# EAGLE board TouScruino-PJ-v0 (EAGLE 6.3)
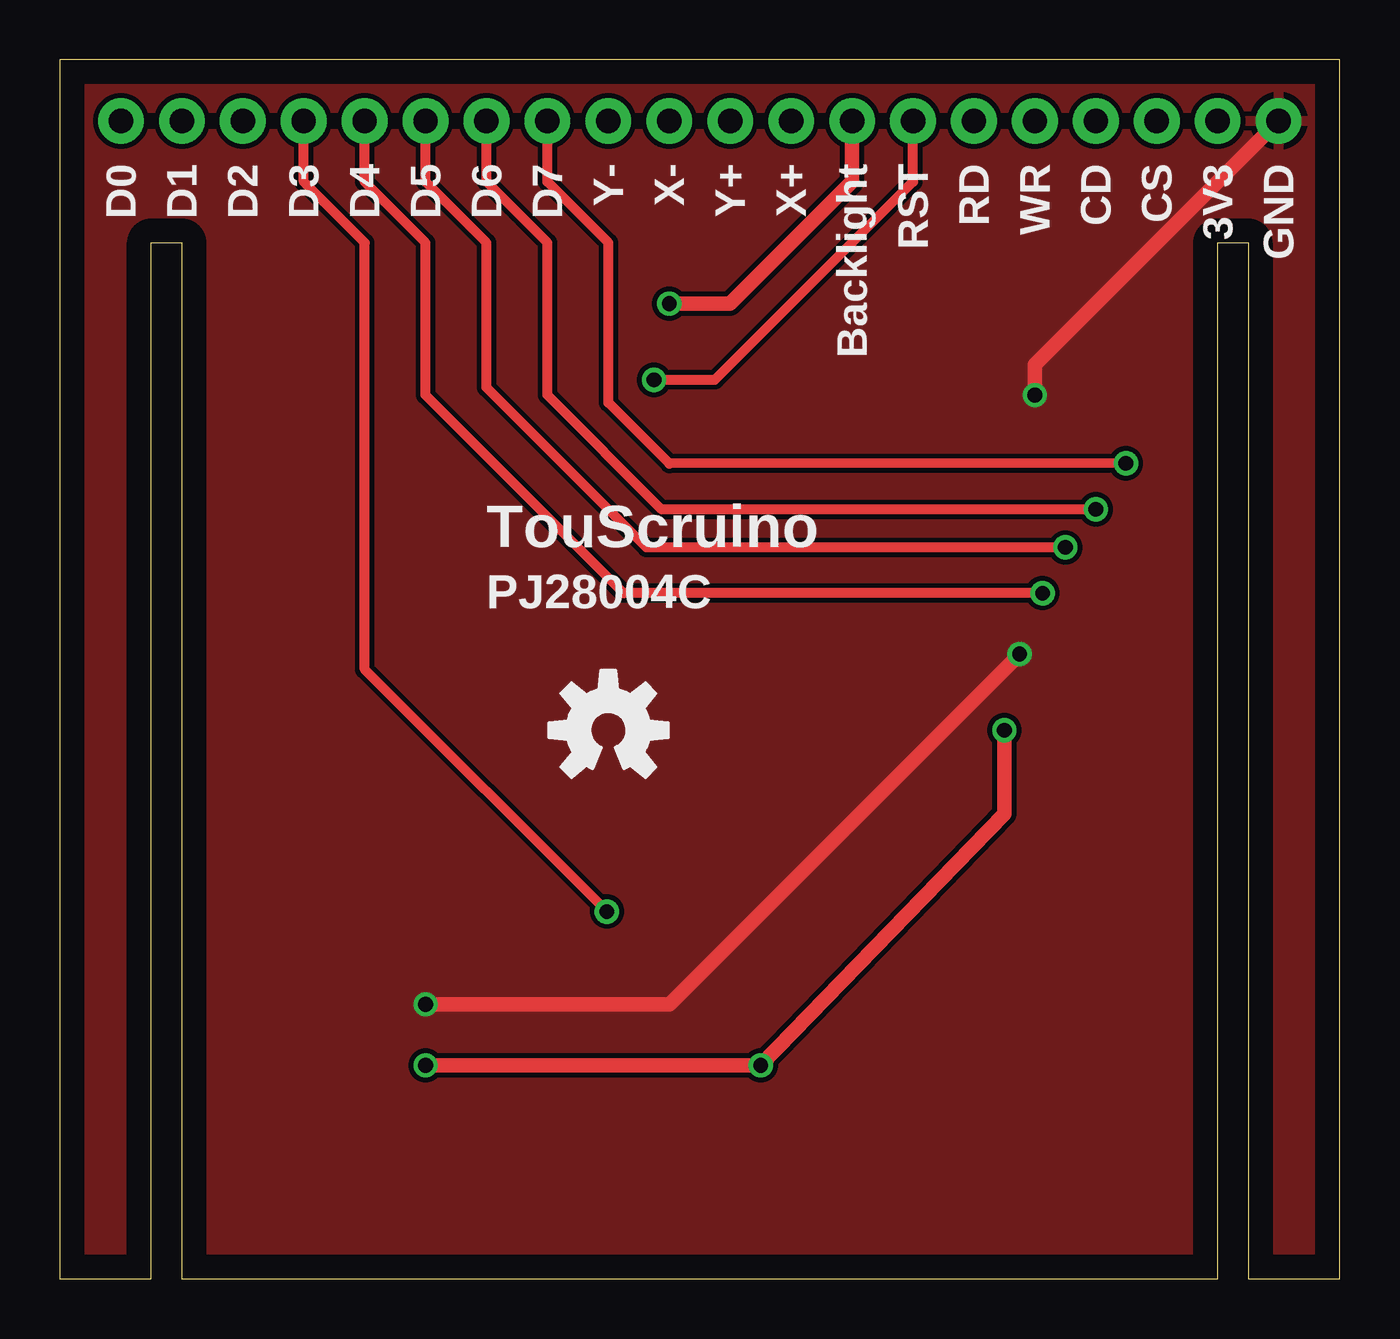
[diagram p0: board, top side]
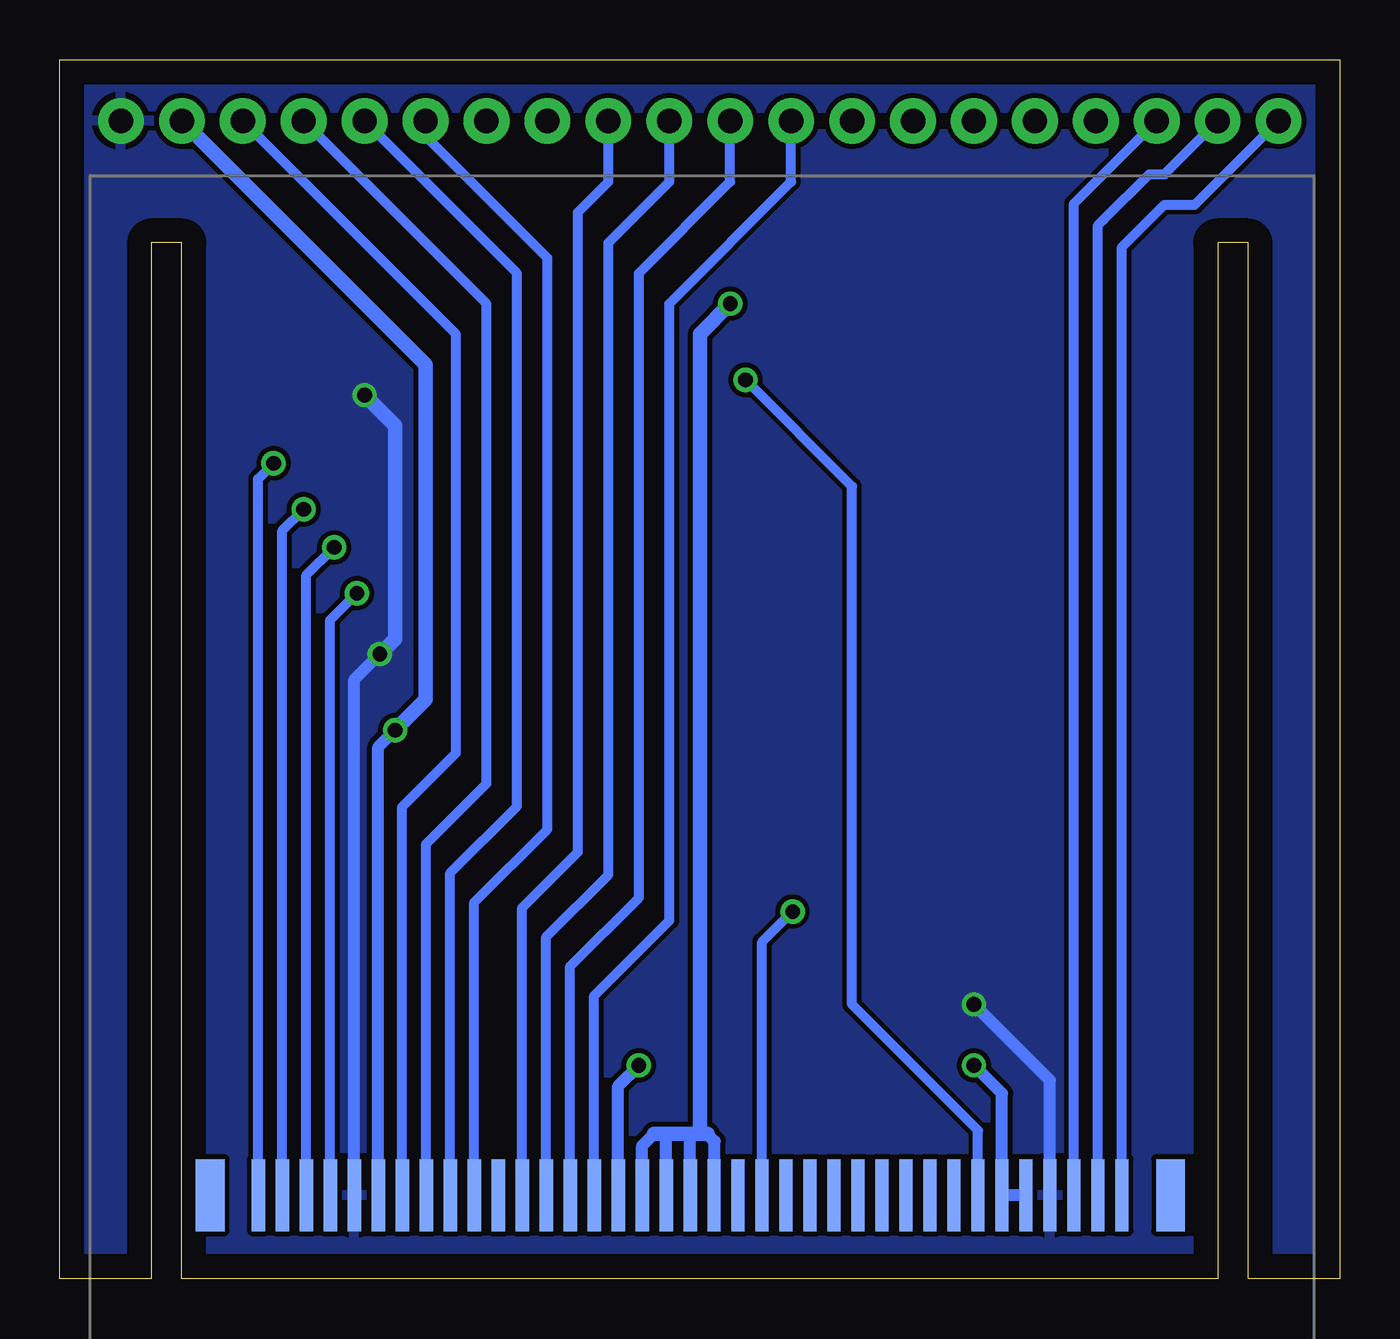
[diagram p1: board, bottom side, seen from below]

Size 53.34 x 50.8 mm. Coordinates in mm from the lower left corner, seen from the top.
Outline: 53.34,0 53.34,50.8 0,50.8 0,0 3.81,0 3.81,43.18 5.08,43.18 5.08,0 48.26,0 48.26,43.18 49.53,43.18 49.53,0 53.34,0
Copper layers (1*16): Top 0.035mm / dielectric 1.5mm / Bottom 0.035mm
Design rules "default": minimum track width 10mil, minimum drill 24mil, track to track 8mil, track to pad 8mil, pad to pad 8mil, via to via 8mil, smd to smd 8mil, copper to edge 40mil, drill to drill 8mil, minimum pad ring 10mil, minimum via ring 8mil, stop-mask expansion 4mil, vias tented up to drill 0mil, thermal gap 10mil
Net classes: 0 default: width 0.203 mm; 1 vcc: width 0.254 mm

## Footprints (pad centres in the part's own frame; a part is rotated, then mirrored left to right if it is on the bottom)
1X20 = drill 1.016 pad 1.905: 1 0,0; 2 2.54,0; 3 5.08,0; 4 7.62,0; 5 10.16,0; 6 12.7,0; 7 15.24,0; 8 17.78,0; 9 20.32,0; 10 22.86,0; 11 25.4,0; 12 27.94,0; 13 30.48,0; 14 33.02,0; 15 35.56,0; 16 38.1,0; 17 40.64,0; 18 43.18,0; 19 45.72,0; 20 48.26,0
TFT_2.8_37 = smd 0.55 x 3: 1 7,26.5; 2 8,26.5; 3 9,26.5; 4 10,26.5; 5 11,26.5; 6 12,26.5; 7 13,26.5; 8 14,26.5; 9 15,26.5; 10 16,26.5; 11 17,26.5; 12 18,26.5; 13 19,26.5; 14 20,26.5; 15 21,26.5; 16 22,26.5; 17 23,26.5; 18 24,26.5; 19 25,26.5; 20 26,26.5; 21 27,26.5; 22 28,26.5; 23 29,26.5; 24 30,26.5; 25 31,26.5; 26 32,26.5; 27 33,26.5; 28 34,26.5; 29 35,26.5; 30 36,26.5; 31 37,26.5; 32 38,26.5; 33 39,26.5; 34 40,26.5; 35 41,26.5; 36 42,26.5; 37 43,26.5 | smd 1.2 x 3: 75 4.988,26.5; 76 45.028,26.5

## Placement (x,y rotation side)
U1  TFT_20  [1X20]  2.54,48.26 0 top
U$2  TFT_2.8_37  [TFT_2.8_37]  52.07,-23.02 0 bottom
U$3  OSHW-LOGOM  [OSHW-LOGO-M]  22.86,22.86 0 top

## Library data of the parts
U1 U$2 = wibauxl
U$3 = SparkFun

## Nets
GND: U1.20 U$2.5 U$2.34
N$1: U1.19 U$2.6 U$2.16 U$2.32 U$2.33
N$2: U1.13 U$2.17 U$2.18 U$2.19 U$2.20
N$5: U1.9 U$2.15
N$6: U1.11 U$2.13
N$7: U1.10 U$2.14
N$8: U1.12 U$2.12
N$9: U1.14 U$2.31
N$10: U1.17 U$2.8
N$11: U1.16 U$2.9
N$12: U1.15 U$2.10
N$13: U1.18 U$2.7
N$14: U1.8 U$2.1
N$15: U1.7 U$2.2
N$16: U1.6 U$2.3
N$17: U1.5 U$2.4
N$18: U1.4 U$2.22
N$19: U1.3 U$2.35
N$20: U1.2 U$2.36
N$21: U1.1 U$2.37

## Tracks (layer width: path | path; a pad name or v marks a point on that pad's centre or on a via)
GND  (via drill 0.61)
  Top 0.61: v40.64,36.83 40.64,38.1 U1.20 | v15.24,11.43 25.4,11.43 v40.01,26.04
  Bottom 0.508: v40.01,26.04 41.07,24.97 U$2.5 | v15.24,11.43 12.07,8.26 U$2.34
  Bottom 0.61: v40.64,36.83 39.37,35.56 39.37,26.67 v40.01,26.04
  pour Bottom: 0,72.07 53.34,72.07 53.34,0 0,0
  pour Top: 0,69.22 53.34,69.22 53.34,0 0,0
N$1  (via drill 0.61)
  Top 0.61: v15.24,8.89 v29.21,8.89 39.37,19.37 v39.37,22.86
  Bottom 0.508: v39.37,22.86 40.07,22.16 U$2.6 | v29.21,8.89 30.07,8.03 U$2.16 | v15.24,8.89 14.07,7.72 U$2.32 U$2.33
  Bottom 0.61: U1.19 38.1,38.1 38.1,24.13 v39.37,22.86
N$2  (via drill 0.61)
  Top 0.61: v25.4,40.64 27.94,40.64 33.02,45.72 U1.13
  Bottom 0.406: 28.07,5.9 27.94,6.03 | 27.15,6.03 27.07,5.95 26.99,6.03
  Bottom 0.508: U$2.17 29.07,5.54 28.57,6.03 | U$2.18 28.07,5.9 | U$2.19 27.07,5.95 | U$2.20 26.05,3.48 26.05,5.73 26.35,6.03
  Bottom 0.61: 26.67,6.03 26.67,39.37 v25.4,40.64 | 28.57,6.03 27.94,6.03 27.15,6.03 | 26.35,6.03 26.67,6.03 | 26.99,6.03 26.67,6.03
N$5
  Bottom 0.406: U1.9 22.86,45.72 27.94,40.64 27.94,14.92 31.07,11.79 U$2.15
N$6
  Bottom 0.406: U1.11 27.94,45.72 30.48,43.18 30.48,16.83 33.07,14.24 U$2.13
N$7
  Bottom 0.406: U1.10 25.4,45.72 29.21,41.91 29.21,15.88 32.07,13.02 U$2.14
N$8
  Bottom 0.406: U1.12 30.48,45.72 31.75,44.45 31.75,17.78 34.07,15.46 U$2.12
N$9  (via drill 0.61)
  Top 0.406: v24.77,37.47 27.3,37.47 35.56,45.72 U1.14
  Bottom 0.406: v24.77,37.47 20.32,33.02 20.32,11.43 15.07,6.18 U$2.31
N$10
  Bottom 0.406: U1.17 35.56,40.64 35.56,20.64 38.07,18.13 U$2.8
N$11
  Bottom 0.406: U1.16 34.29,41.91 34.29,19.68 37.07,16.91 U$2.9
N$12
  Bottom 0.406: U1.15 38.1,47.62 33.02,42.55 33.02,18.73 36.07,15.68 U$2.10
N$13
  Bottom 0.406: U1.18 36.83,39.37 36.83,21.91 39.07,19.67 U$2.7
N$14  (via drill 0.61)
  Top 0.406: v44.44,33.99 25.4,33.97 22.86,36.51 22.86,43.18 20.32,45.72 U1.8
  Bottom 0.406: v44.44,33.99 45.09,33.34 45.07,33.32 U$2.1
N$15  (via drill 0.61)
  Top 0.406: v43.18,32.07 25.08,32.07 20.32,36.83 20.32,43.18 17.78,45.72 U1.7
  Bottom 0.406: v43.18,32.07 44.07,31.18 U$2.2
N$16  (via drill 0.61)
  Top 0.406: v41.91,30.48 24.45,30.48 17.78,37.15 17.78,43.18 15.24,45.72 U1.6
  Bottom 0.406: v41.91,30.48 43.07,29.32 U$2.3
N$17  (via drill 0.61)
  Top 0.406: v40.96,28.57 23.5,28.57 15.24,36.83 15.24,43.18 12.7,45.72 U1.5
  Bottom 0.406: v40.96,28.57 42.07,27.46 U$2.4
N$18  (via drill 0.61)
  Top 0.406: v22.8,15.3 12.7,25.4 12.7,43.18 10.16,45.72 U1.4
  Bottom 0.406: v22.8,15.3 24.07,14.03 U$2.22
N$19
  Bottom 0.406: U1.3 11.07,44.81 U$2.35
N$20
  Bottom 0.406: U1.2 7.3,46.04 7.94,46.04 9.84,44.13 10.07,43.91 U$2.36
N$21
  Bottom 0.406: U1.1 6.03,44.77 7.3,44.77 9.07,43 U$2.37

## Text on the board
tPlace: D0 | D1 | D2 | D3 | D4 | D5 | D6 | D7 | Y- | X- | Y+ | X+ | Backlight | RST | RD | WR | CD | CS | 3V3 | GND | TouScruino | PJ28004C